# EAGLE board ProiectTSC v64 (EAGLE 9.7.0)
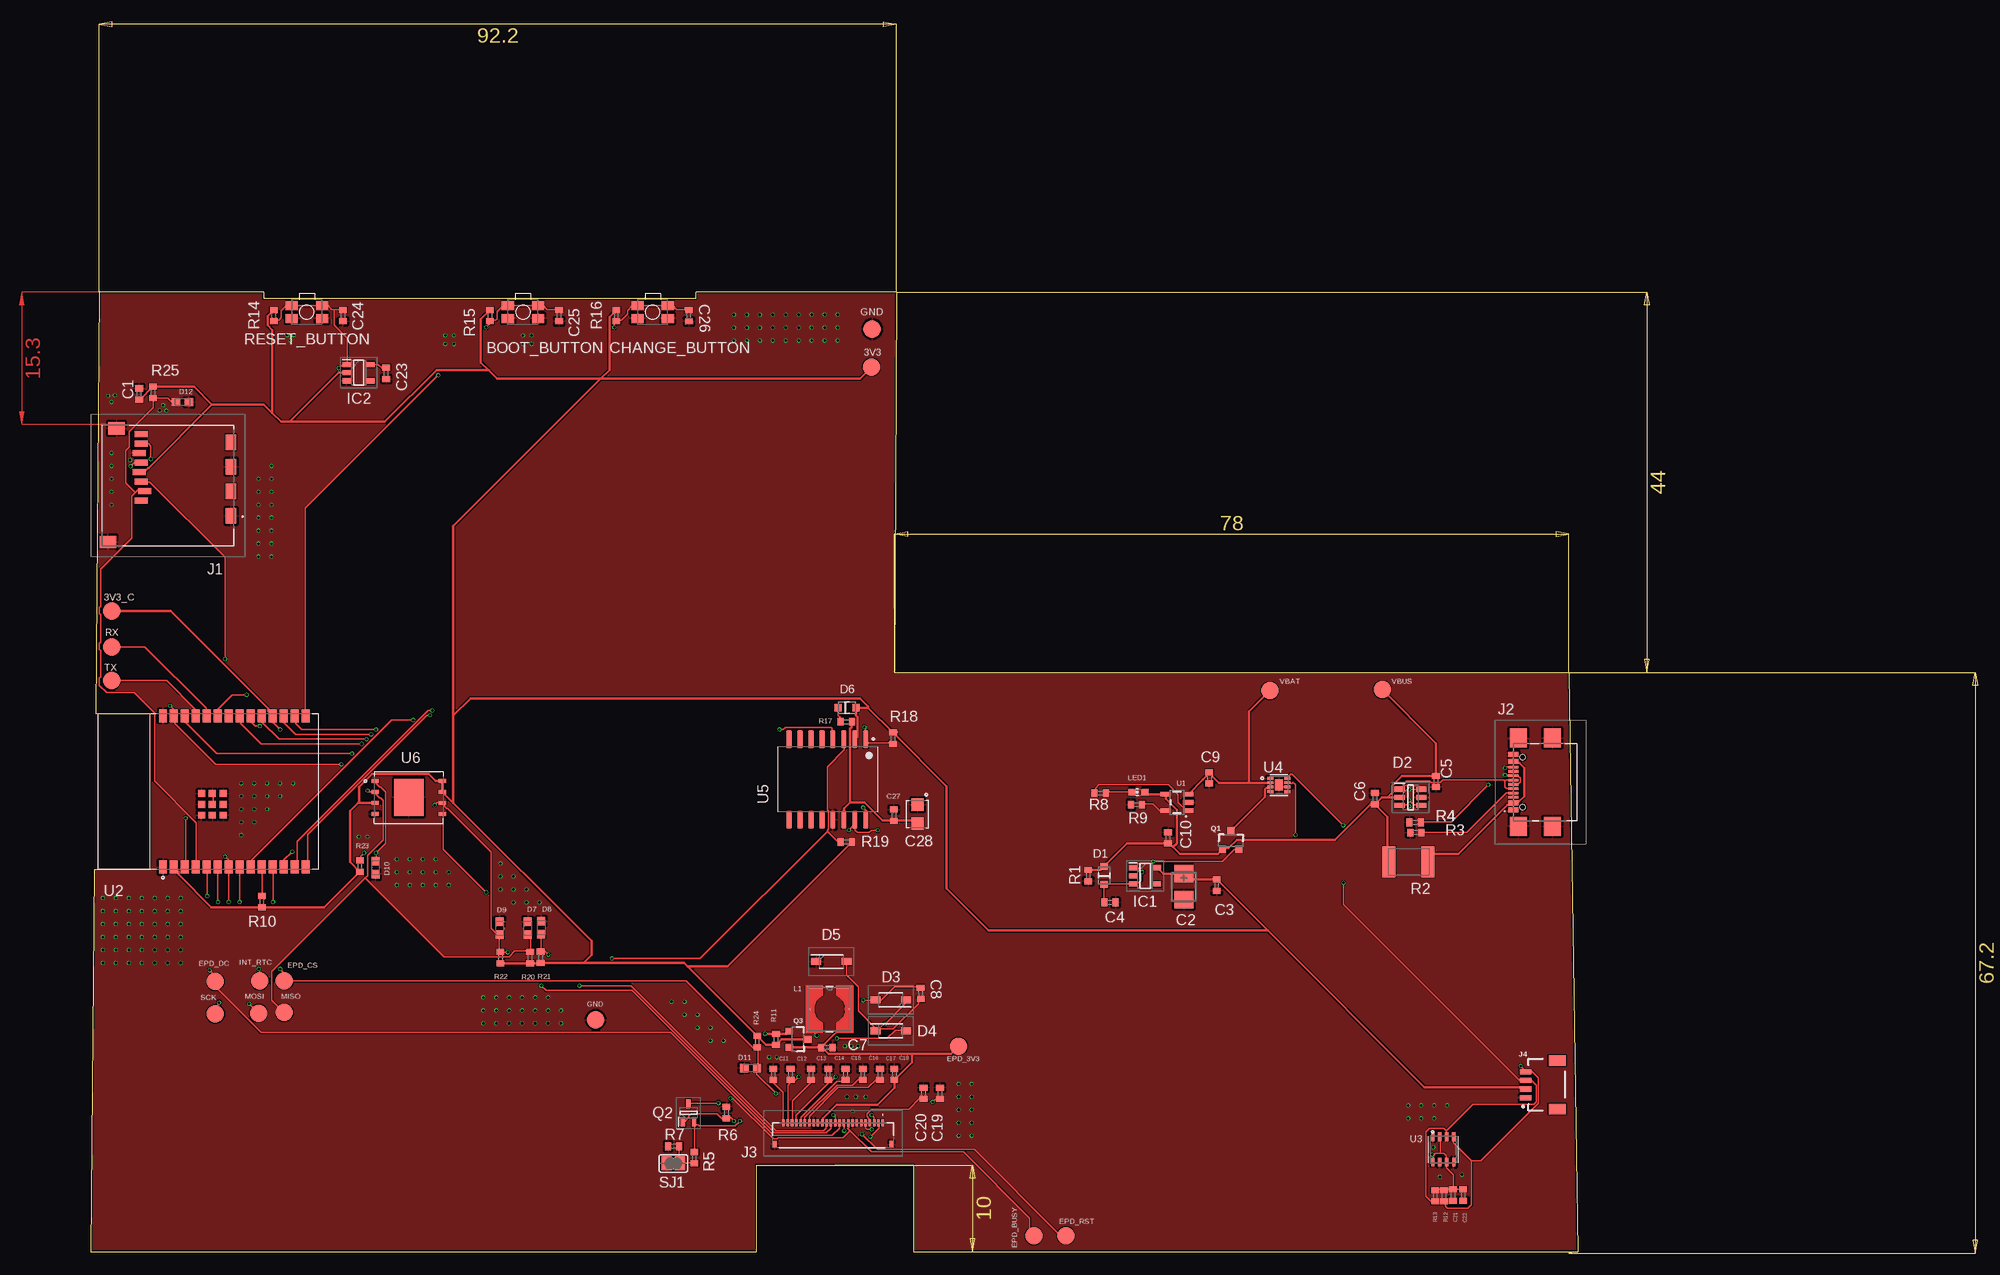
[diagram p0: board, top side]
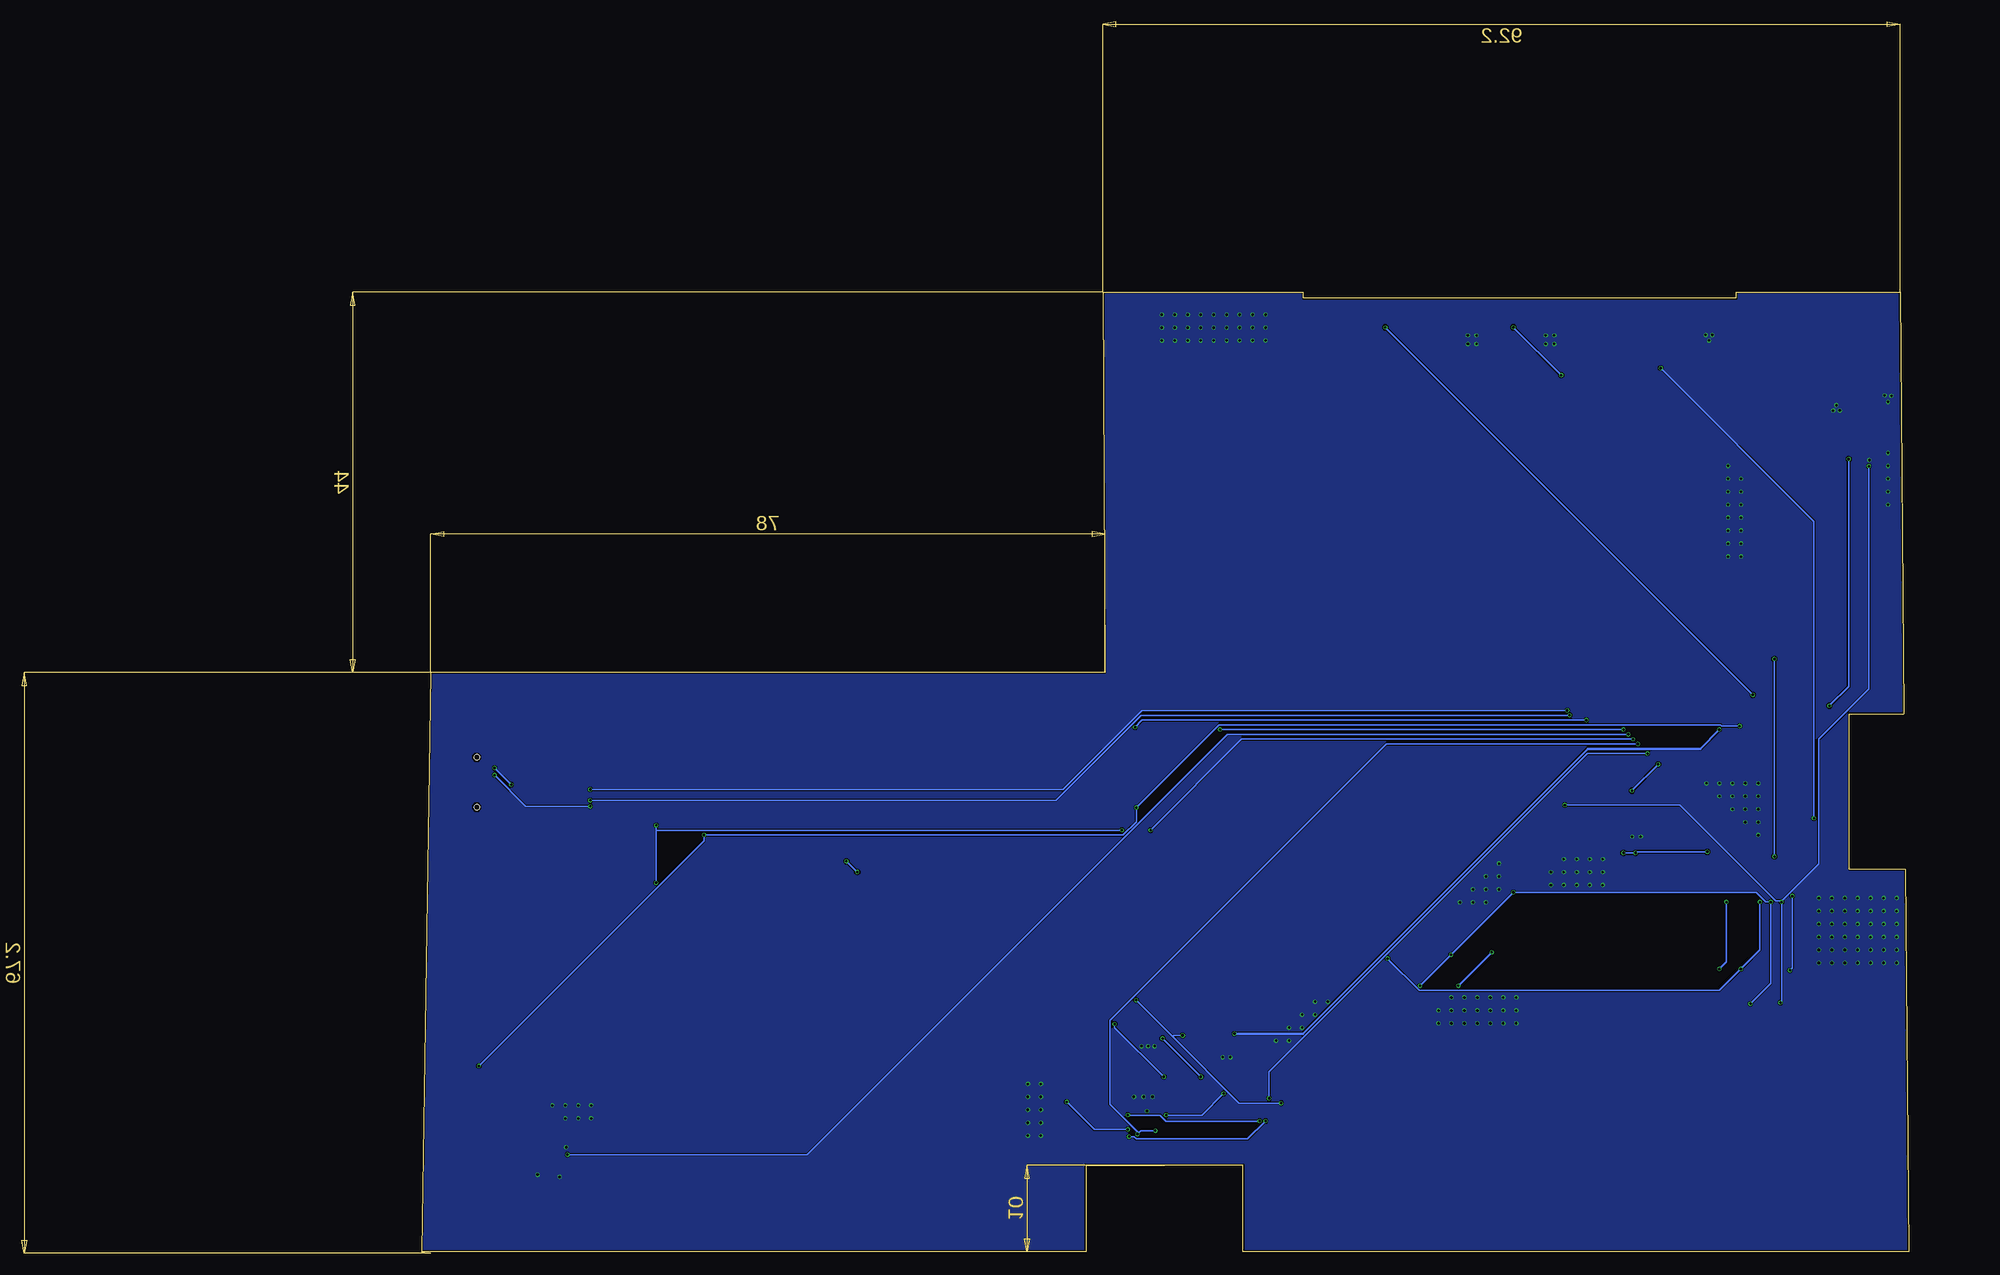
[diagram p1: board, bottom side, seen from below]

Size 172 x 111.2 mm. Coordinates in mm from the lower left corner, seen from the top.
Outline: 172,0.2 171,67.2 93,67.2 93.2,111.2 70,111.2 70,110.5 20,110.5 20,111.2 1,111.2 0.56,62.42 6.86,62.42 6.86,44.42 0.4,44.42 0,0.2 77,0.2 77,10.2 95.2,10.2 95.2,0.2 172,0.2
Outline: 172,0.2 171,0
Copper layers (1*16): Top / Bottom
Stack-up Default Layer Stack: Top User Defined 0.035mm / Dielectric-1 User Defined 1mm / Bottom User Defined 0.035mm
Design rules: minimum copper width 0.12mm, minimum drill size 0.3mm, copper clearance wire_polygon to wire_polygon 5mil, copper clearance wire_polygon to pad_smd 5mil, copper clearance wire_polygon to via 5mil, copper clearance pad_smd to pad_smd 5mil, copper clearance pad_smd to via 5mil, copper clearance via to via 5mil, copper clearance smd to pad (same net) 5mil, copper clearance smd to via (same net) 5mil, copper clearance smd to smd (same net) 5mil, dimension clearance 0.2mm, via restrict clearance 0mil, restrict clearance 0mil, drill distance 6mil, keepout clearance 0mil

## Footprints (pad centres in the part's own frame; a part is rotated, then mirrored left to right if it is on the bottom)
MYBUTTON = smd 1.4 x 1.05: 1 1.75,0.75; 2 -1.75,0.75; 3 -1.75,-0.75; 4 1.75,-0.75
EAGLE-LTSPICE_C0402 = smd 0.7 x 0.9: 1 -0.65,0; 2 0.65,0
RCL_CT3528 = smd 2 x 2.2: + -1.5,0; - 1.5,0
ESP32_WROVER_EAGLE-LTSPICE_C0402 = smd 0.7 x 0.9: 1 -0.65,0; 2 0.65,0
CAPCP3225X100N = smd 1.4 x 1.4: 1 -1.1,0; 2 1.1,0
ESP32_WROVER_AVX---SD0805S020S1R0_AVX_SD0805S020S1R0_0 = smd 0.8 x 0.9: 1 -1.05,0; 2 1.05,0
SOT95P280X145-6N = smd 1.2 x 0.6: 1 -1.25,0.95; 2 -1.25,0; 3 -1.25,-0.95; 4 1.25,-0.95; 5 1.25,0; 6 1.25,0.95
SOD3716X135N = smd 1.15 x 0.8: 1 -1.75,0; 2 1.75,0
DIOC1608X36N = smd 0.97 x 0.94: 1 -0.75,0; 2 0.75,0
SOT95P280X120-5N = smd 0.9 x 0.6: 1 -1.4,0.95; 2 -1.4,0; 3 -1.4,-0.95; 4 1.4,-0.95; 5 1.4,0.95
SOT95P280X125-5N = smd 0.9 x 0.6: 1 -1.4,0.95; 2 -1.4,0; 3 -1.4,-0.95; 4 1.4,-0.95; 5 1.4,0.95
112ATAARR03ATTEND = smd 1.8 x 1.2: G1 10.6,10.4; G2 4.9,10.4; S1 7.75,10.4; S2 2.05,10.4 | smd 1.4 x 1.9: G3 13.6,-3.85; G4 0.45,-2.85 | smd 0.7 x 1.5: P1 8.8,0; P2 7.7,0.4; P3 6.6,0; P4 5.5,-0.2; P5 4.4,0; P6 3.3,-0.2; P7 2.2,0; P8 1.1,0
SAMACSYS_PARTS_USB4110GFA = smd 0.3 x 1.15: A1 -3.35,3.678; A4 -2.55,3.678; A5 -1.25,3.678; A6 -0.25,3.678; A7 0.25,3.678; A8 1.25,3.678; A9 2.55,3.678; A12 3.35,3.678; B1 3.05,3.678; B4 2.25,3.678; B5 1.75,3.678; B6 0.75,3.678; B7 -0.75,3.678; B8 -1.75,3.678; B9 -2.25,3.678; B12 -3.05,3.678 | smd 2.18 x 2: MP1 -5.11,-0.827; MP2 5.11,-0.827; MP3 -5.11,3.103; MP4 5.11,3.103 | hole 0.65: -2.89,2.603; 2.89,2.603
FH34SRJ24S05SH99 = smd 0.3 x 0.8: 1 5.75,1.45; 2 5.25,1.45; 3 4.75,1.45; 4 4.25,1.45; 5 3.75,1.45; 6 3.25,1.45; 7 2.75,1.45; 8 2.25,1.45; 9 1.75,1.45; 10 1.25,1.45; 11 0.75,1.45; 12 0.25,1.45; 13 -0.25,1.45; 14 -0.75,1.45; 15 -1.25,1.45; 16 -1.75,1.45; 17 -2.25,1.45; 18 -2.75,1.45; 19 -3.25,1.45; 20 -3.75,1.45; 21 -4.25,1.45; 22 -4.75,1.45; 23 -5.25,1.45; 24 -5.75,1.45 | smd 0.4 x 0.8: MP1 6.75,-1.05; MP2 -6.75,-1.05
JST04_1MM_RA = smd 0.6 x 1.35: 1 -1.5,0; 2 -0.5,0; 3 0.5,0; 4 1.5,0 | smd 1.2 x 2: NC1 2.8,-3.675; NC2 -2.8,-3.675
IND_4828-WE-TPC_WRE = smd 0.127 x 0.127: 1 -2.286,0; 2 2.286,0
ADAFRUIT_CHIP-LED0603 = smd 0.8 x 0.8: A 0,-0.75; C 0,0.75
ESP32_WROVER_SPARKFUN-DISCRETESEMI_SOT23-3 = smd 0.8 x 0.9: 1 -0.95,-1; 2 0.95,-1; 3 0,1.1
SOT65P210X110-3N = smd 1.05 x 0.5: 1 -1.05,0.65; 2 -1.05,-0.65; 3 1.05,0
ESP32_WROVER_EAGLE-LTSPICE_R0402 = smd 0.7 x 0.9: 1 -0.65,0; 2 0.65,0
ESP32C6_VARISTOR_CT/CN1812 = smd 1.5 x 3.6: 1 -2.25,0; 2 2.25,0
SJ = smd 1.168 x 1.6: 1 -0.762,0; 2 0.762,0
TP20R = smd 2 x 2: TP 0,0
ESP32_WROVER_SPARKFUN-IC-POWER_SOT23-5 = smd 0.55 x 1.2: 1 -0.95,-1.3; 2 0,-1.3; 3 0.95,-1.3; 4 0.95,1.3; 5 -0.95,1.3
XCVR_ESP32-C6-WROOM-1-N8 = smd 1.5 x 0.9: 1 -8.75,5.26; 2 -8.75,3.99; 3 -8.75,2.72; 4 -8.75,1.45; 5 -8.75,0.18; 6 -8.75,-1.09; 7 -8.75,-2.36; 8 -8.75,-3.63; 9 -8.75,-4.9; 10 -8.75,-6.17; 11 -8.75,-7.44; 12 -8.75,-8.71; 13 -8.75,-9.98; 14 -8.75,-11.25; 15 8.75,-11.25; 16 8.75,-9.98; 17 8.75,-8.71; 18 8.75,-7.44; 19 8.75,-6.17; 20 8.75,-4.9; 21 8.75,-3.63; 22 8.75,-2.36; 23 8.75,-1.09; 24 8.75,0.18; 25 8.75,1.45; 26 8.75,2.72; 27 8.75,3.99; 28 8.75,5.26 | smd 0.8 x 0.8: 29_1 -2.755,0.79; 29_2 -1.505,0.79; 29_3 -0.255,0.79; 29_4 -2.755,-0.46; 29_5 -1.505,-0.46; 29_6 -0.255,-0.46; 29_7 -2.755,-1.71; 29_8 -1.505,-1.71; 29_9 -0.255,-1.71
ESP32_WROVER_BME680_PSON80P300X300X100-8N = smd 1.016 x 0.5: 1 1.458,1.2; 2 1.458,0.4; 3 1.458,-0.4; 4 1.458,-1.2; 5 -1.458,-1.22; 6 -1.458,-0.4; 7 -1.458,0.4; 8 -1.458,1.2
SON50P200X200X80-9N = smd 0.76 x 0.27: 1 -0.985,0.75; 2 -0.985,0.25; 3 -0.985,-0.25; 4 -0.985,-0.75; 5 0.985,-0.75; 6 0.985,-0.25; 7 0.985,0.25; 8 0.985,0.75 | smd 0.9 x 1.3: 9 0,0
SOIC127P1032X265-16N = smd 2.05 x 0.59: 1 -4.655,4.445; 2 -4.655,3.175; 3 -4.655,1.905; 4 -4.655,0.635; 5 -4.655,-0.635; 6 -4.655,-1.905; 7 -4.655,-3.175; 8 -4.655,-4.445; 9 4.655,-4.445; 10 4.655,-3.175; 11 4.655,-1.905; 12 4.655,-0.635; 13 4.655,0.635; 14 4.655,1.905; 15 4.655,3.175; 16 4.655,4.445
SON127P600X800X80-9N = smd 0.94 x 0.44: 1 -3.895,1.905; 2 -3.895,0.635; 3 -3.895,-0.635; 4 -3.895,-1.905; 5 3.895,-1.905; 6 3.895,-0.635; 7 3.895,0.635; 8 3.895,1.905 | smd 3.4 x 4.3: 9 0,0

## Placement (x,y rotation side)
BOOT_BUTTON  BUTTON_CUSYOMV1  [MYBUTTON]  50,108.91 180 top
C1  100nF  [EAGLE-LTSPICE_C0402]  5.61,99.42 90 top
C2  100uF  [RCL_CT3528]  126.45,42.42 270 top
C3  4.7uF  [ESP32_WROVER_EAGLE-LTSPICE_C0402]  130.25,42.59 270 top
C4  4.7uF  [ESP32_WROVER_EAGLE-LTSPICE_C0402]  117.9,40.59 0 top
C5  100nF  [EAGLE-LTSPICE_C0402]  155.6,54.59 270 top
C6  4.7uF  [EAGLE-LTSPICE_C0402]  148.55,52.59 90 top
C7  10uF  [EAGLE-LTSPICE_C0402]  85.15,23.81 0 top
C8  4.7uF/25V  [EAGLE-LTSPICE_C0402]  96.01,30.07 91 top
C9  4.7uF  [EAGLE-LTSPICE_C0402]  129.39,55 270 top
C10  4.7uF  [EAGLE-LTSPICE_C0402]  124.61,48.05 90 top
C11  1uF/50V  [EAGLE-LTSPICE_C0402]  78.96,20.7 270 top
C12  1uF/50V  [EAGLE-LTSPICE_C0402]  80.96,20.7 270 top
C13  1uF/50V  [EAGLE-LTSPICE_C0402]  83.31,20.7 270 top
C14  1uF/50V  [EAGLE-LTSPICE_C0402]  85.31,20.7 270 top
C15  1uF/50V  [EAGLE-LTSPICE_C0402]  87.31,20.7 270 top
C16  1uF/50V  [EAGLE-LTSPICE_C0402]  89.31,20.7 270 top
C17  1uF/50V  [EAGLE-LTSPICE_C0402]  91.31,20.7 270 top
C18  0.1uF/50V  [EAGLE-LTSPICE_C0402]  92.96,20.7 270 top
C19  1uF/50V  [EAGLE-LTSPICE_C0402]  98.23,18.51 90 top
C20  1uF/50V  [EAGLE-LTSPICE_C0402]  96.34,18.51 90 top
C21  100nF  [EAGLE-LTSPICE_C0402]  157.57,6.75 270 top
C22  100nF  [EAGLE-LTSPICE_C0402]  158.76,6.75 270 top
C23  100nF  [EAGLE-LTSPICE_C0402]  34.18,101.8 270 top
C24  1uF  [EAGLE-LTSPICE_C0402]  29.18,108.48 270 top
C25  100nF  [EAGLE-LTSPICE_C0402]  54.18,108.48 270 top
C26  100nF  [EAGLE-LTSPICE_C0402]  69.18,108.47 271.4 top
C27  100nF  [EAGLE-LTSPICE_C0402]  92.9,50.68 90 top
C28  CPH3225A  [CAPCP3225X100N]  95.64,50.8 270 top
CHANGE_BUTTON  BUTTON_CUSYOMV1  [MYBUTTON]  65,108.91 180 top
D1  ESP32_WROVER_AVX---SD0805S020S1R0_AVX_SD0805S020S1R0_0_0AVX_SD0805S020S1R0_0_0  [ESP32_WROVER_AVX---SD0805S020S1R0_AVX_SD0805S020S1R0_0]  117.23,43.73 90 top
D2  USBLC6-2SC6Y  [SOT95P280X145-6N]  152.68,52.75 0 top
D3  4.7uF/25V  [SOD3716X135N]  92.56,29.3 180 top
D4  MBR0530  [SOD3716X135N]  92.54,25.75 0 top
D5  MBR0530  [SOD3716X135N]  85.66,33.75 0 top
D6  ESP32_WROVER_AVX---SD0805S020S1R0_AVX_SD0805S020S1R0_0_0AVX_SD0805S020S1R0_0_0  [ESP32_WROVER_AVX---SD0805S020S1R0_AVX_SD0805S020S1R0_0]  87.48,63.11 0 top
D7  PGB1010603MR  [DIOC1608X36N]  50.55,37.63 270 top
D8  PGB1010603MR  [DIOC1608X36N]  52.12,37.67 270 top
D9  PGB1010603MR  [DIOC1608X36N]  47.31,37.63 270 top
D10  PGB1010603MR  [DIOC1608X36N]  32.95,44.6 90 top
D11  PGB1010603MR  [DIOC1608X36N]  76.33,21.43 0 top
D12  PGB1010603MR  [DIOC1608X36N]  10.6,98.47 180 top
IC1  XC6220A331MR-G  [SOT95P280X120-5N]  121.96,43.67 0 top
IC2  BD5229G-TR  [SOT95P280X125-5N]  30.99,101.88 0 top
J1  112A-TAAR-R03_ATTEND  [112ATAARR03ATTEND]  5.83,95.9 270 top
J2  SAMACSYS_PARTS_USB4110-GF-A  [SAMACSYS_PARTS_USB4110GFA]  168.25,54.5 90 top
J3  FH34SRJ-24S-0.5SH_99_  [FH34SRJ24S05SH99]  85.87,13.67 0 top
J4  QWIIC_RIGHT_ANGLE  [JST04_1MM_RA]  165.97,19.5 90 top
L1  68uH  [IND_4828-WE-TPC_WRE]  85.47,28.25 0 top
LED1  [ADAFRUIT_CHIP-LED0603]  121.2,53.35 90 top
Q1  20V/4.2A/52mΩ/1.4W  [ESP32_WROVER_SPARKFUN-DISCRETESEMI_SOT23-3]  131.88,47.76 0 top
Q2  SI1308EDL-T1-GE3  [SOT65P210X110-3N]  69.14,16.24 90 top
Q3  20V/4.2A/52mΩ/1.4W  [ESP32_WROVER_SPARKFUN-DISCRETESEMI_SOT23-3]  81.8,24.76 270 top
R1  100K  [ESP32_WROVER_EAGLE-LTSPICE_R0402]  115.39,43.7 270 top
R2  ESP32C6_VARISTORCN1812  [ESP32C6_VARISTOR_CT/CN1812]  152.44,45.29 180 top
R3  5k1  [ESP32_WROVER_EAGLE-LTSPICE_R0402]  153.28,48.68 0 top
R4  5k1  [ESP32_WROVER_EAGLE-LTSPICE_R0402]  153.21,49.85 180 top
R5  0.47  [ESP32_WROVER_EAGLE-LTSPICE_R0402]  69.83,11.06 90 top
R6  10k  [ESP32_WROVER_EAGLE-LTSPICE_R0402]  73.53,16.29 90 top
R7  2.2  [ESP32_WROVER_EAGLE-LTSPICE_R0402]  67.43,12.37 0 top
R8  200  [ESP32_WROVER_EAGLE-LTSPICE_R0402]  116.78,53.24 180 top
R9  2k  [ESP32_WROVER_EAGLE-LTSPICE_R0402]  120.98,51.91 0 top
R10  10k  [ESP32_WROVER_EAGLE-LTSPICE_R0402]  19.79,40.69 270 top
R11  10k  [ESP32_WROVER_EAGLE-LTSPICE_R0402]  79.27,24.76 270 top
R12  10k  [ESP32_WROVER_EAGLE-LTSPICE_R0402]  156.54,6.65 90 top
R13  10k  [ESP32_WROVER_EAGLE-LTSPICE_R0402]  155.51,6.65 90 top
R14  10k  [ESP32_WROVER_EAGLE-LTSPICE_R0402]  21.18,108.48 90 top
R15  10k  [ESP32_WROVER_EAGLE-LTSPICE_R0402]  46.18,108.48 90 top
R16  10k  [ESP32_WROVER_EAGLE-LTSPICE_R0402]  60.8,108.48 90 top
R17  15  [ESP32_WROVER_EAGLE-LTSPICE_R0402]  87.4,61.49 0 top
R18  10K  [ESP32_WROVER_EAGLE-LTSPICE_R0402]  92.79,59.6 90 top
R19  10k  [ESP32_WROVER_EAGLE-LTSPICE_R0402]  87.4,47.6 0 top
R20  10k  [ESP32_WROVER_EAGLE-LTSPICE_R0402]  50.81,34.21 270 top
R21  10k  [ESP32_WROVER_EAGLE-LTSPICE_R0402]  52.05,34.25 270 top
R22  10k  [ESP32_WROVER_EAGLE-LTSPICE_R0402]  47.39,34.2 270 top
R23  10k  [ESP32_WROVER_EAGLE-LTSPICE_R0402]  31.13,44.8 270 top
R24  10k  [ESP32_WROVER_EAGLE-LTSPICE_R0402]  77.1,24.49 90 top
R25  10k  [ESP32_WROVER_EAGLE-LTSPICE_R0402]  7.19,99.6 90 top
RESET_BUTTON  BUTTON_CUSYOMV1  [MYBUTTON]  25,108.91 180 top
SJ1  [SJ]  67.39,10.4 0 top
TP1  TPTP20R  [TP20R]  2.4,66.25 0 top
TP2  TPTP20R  [TP20R]  2.4,70.17 0 top
TP3  TPTP20R  [TP20R]  136.4,65.09 0 top
TP4  TPTP20R  [TP20R]  58.4,27.01 0 top
TP5  TPTP20R  [TP20R]  90.4,106.93 0 top
TP6  TPTP20R  [TP20R]  22.4,27.85 0 top
TP7  TPTP20R  [TP20R]  19.4,27.77 0 top
TP8  TPTP20R  [TP20R]  14.4,27.69 0 top
TP9  TPTP20R  [TP20R]  109.1,2.01 0 top
TP10  TPTP20R  [TP20R]  22.4,31.53 0 top
TP11  TPTP20R  [TP20R]  14.4,31.45 0 top
TP12  TPTP20R  [TP20R]  112.8,2.05 0 top
TP13  TPTP20R  [TP20R]  2.4,74.29 0 top
TP14  TPTP20R  [TP20R]  149.4,65.21 0 top
TP15  TPTP20R  [TP20R]  19.56,31.5 0 top
TP16  TPTP20R  [TP20R]  90.32,102.53 0 top
TP17  TPTP20R  [TP20R]  100.4,23.97 0 top
U1  ESP32_WROVER_SPARKFUN-IC-POWER_MCP73831  [ESP32_WROVER_SPARKFUN-IC-POWER_SOT23-5]  125.66,52.16 90 top
U2  ESP32-C6-WROOM-1-N8  [XCVR_ESP32-C6-WROOM-1-N8]  13.6,53.44 90 top
U3  ESP32_WROVER_BME680_BME680  [ESP32_WROVER_BME680_PSON80P300X300X100-8N]  156.45,12.01 90 top
U4  MAX17048G+T10  [SON50P200X200X80-9N]  137.45,54.19 0 top
U5  DS3231SN#  [SOIC127P1032X265-16N]  85.21,54.81 270 top
U6  W25Q512JVEIQ  [SON127P600X800X80-9N]  36.78,52.74 0 top

## Library data of the parts
BOOT_BUTTON C3 C4 CHANGE_BUTTON LED1 R2 RESET_BUTTON SJ1 TP1-TP17 = DeskAssistant v19 v1
C1 C5-C27 = DeskAssistant v19 v1; SPICEMODEL: NONE; SPICEPREFIX: C
C2 = DeskAssistant v19 v1; SPICEPREFIX: C
C28 = DeskAssistant v19 v1; AVAILABILITY: Not in stock; CHECK_PRICES: https://www.snapeda.com/parts/CPH3225A/Seiko+Instruments/view-part/?ref=eda; DESCRIPTION: 11 mF (EDLC) Supercapacitor 3.3 V 1210 (3225 Metric) - -; MF: Seiko Instruments; MP: CPH3225A; PACKAGE: 1210 Seiko; PRICE: None; PURCHASE-URL: https://www.snapeda.com/api/url_track_click_mouser/?unipart_id=562593&manufacturer=Seiko Instruments&part_name=CPH3225A&search_term=None; SNAPEDA_LINK: https://www.snapeda.com/parts/CPH3225A/Seiko+Instruments/view-part/?ref=snap
D1 D6 = DeskAssistant v19 v1; CENTROID_NOT_SPECIFIED: No; DATASHEET: http://datasheets.avx.com/schottky.pdf; DIGIKEY_DESCRIPTION: DIODE SCHOTTKY 20V 1A 0805; DIGIKEY_PART_NUMBER: 478-7800-1-ND; LEAD_FREE: yes; MF: AVX; MOUSER_PART_NUMBER: 581-SD0805S020S1R0; PACKAGE: 0805 (2012 metric); PREFIX: D; ROHS: yes; TEMPERATURE_RANGE_HIGH: +125°C; TEMPERATURE_RANGE_LOW: -55°C
D2 = DeskAssistant v19 v1; AVAILABILITY: In Stock; CHECK_PRICES: https://www.snapeda.com/parts/USBLC6-2SC6Y/STMicroelectronics/view-part/?ref=eda; DESCRIPTION: 17V Clamp 5A (8/20µs) Ipp Tvs Diode Surface Mount SOT-23-6; MF: STMicroelectronics; MP: USBLC6-2SC6Y; PACKAGE: SOT-23-6 STMicroelectronics; PRICE: None; SNAPEDA_LINK: https://www.snapeda.com/parts/USBLC6-2SC6Y/STMicroelectronics/view-part/?ref=snap
D3-D5 = DeskAssistant v19 v1; AVAILABILITY: In Stock; CHECK_PRICES: https://www.snapeda.com/parts/MBR0530/Onsemi/view-part/?ref=eda; DESCRIPTION: Diode Schottky 30 V 500mA Surface Mount SOD-123; MF: ON Semiconductor; MP: MBR0530; PACKAGE: SOD-123-2 ON Semiconductor; PRICE: None; PURCHASE-URL: https://www.snapeda.com/api/url_track_click_mouser/?unipart_id=179458&manufacturer=ON Semiconductor&part_name=MBR0530&search_term=None; SNAPEDA_LINK: https://www.snapeda.com/parts/MBR0530/Onsemi/view-part/?ref=snap
D7-D12 = DeskAssistant v19 v1; AVAILABILITY: In Stock; CHECK_PRICES: https://www.snapeda.com/parts/PGB1010603MR/Littelfuse/view-part/?ref=eda; DESCRIPTION: 150V (Typ) Clamp - Ipp Tvs Diode Surface Mount 0603 (1608 Metric); MF: Littelfuse Inc.; MP: PGB1010603MR; PACKAGE: 0603 Littelfuse Inc.; PRICE: None; PURCHASE-URL: https://www.snapeda.com/api/url_track_click_mouser/?unipart_id=5659453&manufacturer=Littelfuse Inc.&part_name=PGB1010603MR&search_term=None; SNAPEDA_LINK: https://www.snapeda.com/parts/PGB1010603MR/Littelfuse/view-part/?ref=snap
IC1 = DeskAssistant v19 v1; DESCRIPTION: LDO Voltage Regulators; HEIGHT: 1.2mm; MANUFACTURER_NAME: Torex; MANUFACTURER_PART_NUMBER: XC6220A331MR-G; MOUSER_PART_NUMBER: 865-XC6220A331MR-G; MOUSER_PRICE-STOCK: https://www.mouser.co.uk/ProductDetail/Torex-Semiconductor/XC6220A331MR-G?qs=AsjdqWjXhJ8ZSWznL1J0gg%3D%3D
IC2 = DeskAssistant v19 v1; DESCRIPTION: Voltage Detector with Adjustable Delay Time: CMOS processes are utilized to develop high precision, low current consumption CMOS reset ICs that allow arbitrary setting of the delay time. The extensive lineup includes both Nch Open Drain and CMOS output types in a wide range of detection voltages (from 2.3V to 6.0V, in 0.1V steps), enabling selection of the ideal solution based on customer requirements. In addition, the entire series is of course both lead-free and RoHS-compliant.; HEIGHT: 1.25mm; MANUFACTURER_NAME: ROHM Semiconductor; MANUFACTURER_PART_NUMBER: BD5229G-TR; MOUSER_PART_NUMBER: 755-BD5229G-TR; MOUSER_PRICE-STOCK: https://www.mouser.co.uk/ProductDetail/ROHM-Semiconductor/BD5229G-TR?qs=4kLU8WoGk0vvnhrrYwdszw%3D%3D
J1 = DeskAssistant v19 v1; DESCRIPTION: Micro SD Card Socket, Push-Push Type, Top Mount, SMT, H=1.83mm, 10u; HEIGHT: 1.9mm; MANUFACTURER_NAME: ATTEND; MANUFACTURER_PART_NUMBER: 112A-TAAR-R03 ATTEND
J2 = DeskAssistant v19 v1; DESCRIPTION: CONN USB 2.0 TYPE-C R/A SMT; HEIGHT: 3.26mm; MANUFACTURER_NAME: GCT (GLOBAL CONNECTOR TECHNOLOGY); MANUFACTURER_PART_NUMBER: USB4110-GF-A; MOUSER_PART_NUMBER: 640-USB4110-GF-A; MOUSER_PRICE-STOCK: https://www.mouser.co.uk/ProductDetail/GCT/USB4110-GF-A?qs=KUoIvG%2F9IlYiZvIXQjyJeA%3D%3D
J3 = DeskAssistant v19 v1; DESCRIPTION: 24 Position FFC, FPC Connector Contacts, Top and Bottom 0.020" (0.50mm) Surface Mount, Right Angle; HEIGHT: 1.1mm; MANUFACTURER_NAME: Hirose; MANUFACTURER_PART_NUMBER: FH34SRJ-24S-0.5SH(99); MOUSER_PART_NUMBER: 798-FH34SRJ24S05SH99; MOUSER_PRICE-STOCK: https://www.mouser.co.uk/ProductDetail/Hirose-Connector/FH34SRJ-24S-0.5SH99?qs=vcbW%252B4%252BSTIpKBl5ap9J8Fw%3D%3D
J4 = DeskAssistant v19 v1; PROD_ID: CONN-13694
L1 = DeskAssistant v19 v1; COPYRIGHT: Copyright (C) 2024 Ultra Librarian. All rights reserved.; MANUFACTURER_PART_NUMBER: 744043680; MFR_NAME: Wurth Electronics
Q1 Q3 = DeskAssistant v19 v1; PROD_ID: TRAN-14388
Q2 = DeskAssistant v19 v1; AVAILABILITY: In Stock; CHECK_PRICES: https://www.snapeda.com/parts/SI1308EDL-T1-GE3/Vishay+Siliconix/view-part/?ref=eda; DESCRIPTION: Si1308EDL-T1-GE3 N-channel MOSFET Transistor, 1.5 A, 30 V, 3-Pin SC-70 | Siliconix / Vishay SI1308EDL-T1-GE3; MF: Vishay Siliconix; MP: SI1308EDL-T1-GE3; PACKAGE: SOT-323 Vishay Semiconductor; PRICE: None; PURCHASE-URL: https://www.snapeda.com/api/url_track_click_mouser/?unipart_id=274603&manufacturer=Vishay Siliconix&part_name=SI1308EDL-T1-GE3&search_term=None; SNAPEDA_LINK: https://www.snapeda.com/parts/SI1308EDL-T1-GE3/Vishay+Siliconix/view-part/?ref=snap
R1 R3-R25 = DeskAssistant v19 v1; SPICEMODEL: NONE; SPICEPREFIX: R
U1 = DeskAssistant v19 v1; PROD_ID: IC-09995
U2 = DeskAssistant v19 v1; AVAILABILITY: In Stock; CHECK_PRICES: https://www.snapeda.com/parts/ESP32-C6-WROOM-1-N8/Espressif+Systems/view-part/?ref=eda; DESCRIPTION: Multiprotocol Modules ESP32-C6 module, Wi-Fi 6 in 2.4 GHz band, Bluetooth 5, Zigbee 3.0 and Thread. ESP34-WROOM Compatible - ENGINEERING SAMPLE; MF: Espressif Systems; MP: ESP32-C6-WROOM-1-N8; PACKAGE: None; PRICE: None; SNAPEDA_LINK: https://www.snapeda.com/parts/ESP32-C6-WROOM-1-N8/Espressif+Systems/view-part/?ref=snap
U3 = DeskAssistant v19 v1; AVAILABILITY: Unavailable; DESCRIPTION: Integrated Environmental Unit; MF: Bosch Sensortec; MP: BME680; PACKAGE: LGA-8 Bosch Tools; PRICE: None
U4 = DeskAssistant v19 v1; AVAILABILITY: In Stock; CHECK_PRICES: https://www.snapeda.com/parts/MAX17048G+T10/Analog+Devices/view-part/?ref=eda; DESCRIPTION: 3µA 1-Cell/2-Cell Fuel Gauge with ModelGauge; MF: Analog Devices; MP: MAX17048G+T10; PACKAGE: TDFN-8 Maxim; PRICE: None; PURCHASE-URL: https://www.snapeda.com/api/url_track_click_mouser/?unipart_id=329239&manufacturer=Analog Devices&part_name=MAX17048G+T10&search_term=None; SNAPEDA_LINK: https://www.snapeda.com/parts/MAX17048G+T10/Analog+Devices/view-part/?ref=snap
U5 = DeskAssistant v19 v1; AVAILABILITY: In Stock; CHECK_PRICES: https://www.snapeda.com/parts/DS3231SN%23/Analog+Devices/view-part/?ref=eda; DESCRIPTION: Extremely Accurate I²C-Integrated RTC/TCXO/Crystal; MF: Analog Devices; MP: DS3231SN#; PACKAGE: SOIC-16 Maxim; PRICE: None; PURCHASE-URL: https://www.snapeda.com/api/url_track_click_mouser/?unipart_id=99048&manufacturer=Analog Devices&part_name=DS3231SN#&search_term=None; SNAPEDA_LINK: https://www.snapeda.com/parts/DS3231SN%23/Analog+Devices/view-part/?ref=snap
U6 = DeskAssistant v19 v1; AVAILABILITY: In Stock; CHECK_PRICES: https://www.snapeda.com/parts/W25Q512JVEIQ/Winbond+Electronics/view-part/?ref=eda; DESCRIPTION: FLASH - NOR Memory IC 512Mb (64M x 8) SPI - Quad I/O 133 MHz 8-WSON (8x6); MF: Winbond Electronics; MP: W25Q512JVEIQ; PACKAGE: Package; PRICE: None; SNAPEDA_LINK: https://www.snapeda.com/parts/W25Q512JVEIQ/Winbond+Electronics/view-part/?ref=snap

## Nets
3V3: C1.1 C2.+ C3.1 D6.2 IC1.5 IC2.2 J1.P4 J4.2 Q3.3 R10.2 R11.2 R14.2 R15.2 R16.2 R18.2 R19.2 R20.2 R21.2 R22.2 R23.2 R24.2 R25.2 TP16.TP U2.2 U5.2 U6.3 U6.7 U6.8
32KHZ: R18.1 U2.9 U5.1
DN: D2.1 J2.A7 J2.B7
DP: D2.3 J2.A6 J2.B6
EPD_3V3: C7.1 C18.2 J3.15 J3.16 L1.2 Q3.2 TP17.TP
EPD_3V3_C: Q3.1 R11.1 TP13.TP U2.18
EPD_BUSY: J3.9 TP9.TP U2.26
EPD_CS: D11.2 J3.12 R24.1 TP10.TP U2.11
EPD_DC: J3.11 TP11.TP U2.5
EPD_RST: J3.10 TP12.TP U2.21
FLASH_CS: D10.2 R23.1 U2.12 U6.1
GDR: J3.2 Q2.1 R6.1
GND: BOOT_BUTTON.1 BOOT_BUTTON.2 C1.2 C2.- C3.2 C4.2 C5.2 C6.2 C7.2 C9.2 C10.2 C11.1 C12.1 C13.1 C14.1 C15.1 C16.1 C17.1 C18.1 C19.2 C20.2 C21.2 C22.2 C23.2 C24.2 C25.2 C26.2 C27.2 C28.1 CHANGE_BUTTON.1 CHANGE_BUTTON.2 D2.5 D5.1 D7.1 D8.1 D9.1 D10.1 D11.1 D12.1 IC1.2 IC2.3 J1.G1 J1.G2 J1.G3 J1.G4 J1.P6 J2.A1 J2.A12 J2.B1 J2.B12 J2.MP1 J2.MP2 J2.MP3 J2.MP4 J3.8 J3.17 J3.MP1 J3.MP2 J4.1 R1.2 R3.1 R4.2 R6.2 R7.1 R9.1 RESET_BUTTON.1 RESET_BUTTON.2 SJ1.1 TP4.TP TP5.TP U1.2 U2.1 U2.28 U2.29_1 U2.29_2 U2.29_3 U2.29_4 U2.29_5 U2.29_6 U2.29_7 U2.29_8 U2.29_9 U3.1 U3.5 U3.7 U4.1 U4.4 U4.6 U4.9 U5.13 U6.4 U6.9
GPIO8: R10.1 U2.10
I2C_PW: C21.1 C22.1 R12.2 R13.2 U2.17 U3.2 U3.6 U3.8
INT_RTC: R19.1 TP15.TP U2.8 U5.3
IO/BOOT: BOOT_BUTTON.3 BOOT_BUTTON.4 C25.1 R15.1 U2.15
IO/CHANGE: C26.1 CHANGE_BUTTON.3 CHANGE_BUTTON.4 R16.1 U2.23
MISO: D7.2 J1.P7 R20.1 TP6.TP U2.27 U6.2
MOSI: D8.2 J1.P3 J3.14 R21.1 TP7.TP U2.7 U6.5
N$1: J2.B5 R4.1
N$2: C11.2 J3.24
N$3: C8.1 D4.1 D5.2
N$4: J2.A5 R3.2
N$5: C19.1 J3.5
N$6: C4.1 D1.1 IC1.1 IC1.3 Q1.2
N$7: R9.2 U1.5
N$8: C23.1 IC2.5
N$9: C20.1 J3.4
N$10: C13.2 J3.22
N$11: R8.2 U1.1
N$12: LED1.C R8.1
N$13: D6.1 R17.1
N$16: C15.2 J3.20
N$18: C16.2 J3.19
N$20: C17.2 J3.18
PREVGH: C14.2 D3.1 J3.21
PREVGL: C12.2 D4.2 J3.23
RESE: J3.3 Q2.2 R5.2
RESE': R5.1 R7.2 SJ1.2
RESET: C24.1 IC2.1 R14.1 RESET_BUTTON.3 RESET_BUTTON.4 U2.3
RTC_RST: U2.16 U5.4
RX: TP2.TP U2.24
SCK: D9.2 J1.P5 J3.13 R22.1 TP8.TP U2.6 U6.6
SCL: J4.4 R12.1 U2.20 U3.4 U4.7 U5.16
SDA: J4.3 R13.1 U2.19 U3.3 U4.8 U5.15
SRC: C8.2 D3.2 L1.1 Q2.3
SS_SD: D12.2 J1.P2 R25.1 U2.4
TX: TP1.TP U2.25
USB_D+: D2.4 U2.14
USB_D-: D2.6 U2.13
VBAT: C9.1 Q1.3 TP3.TP U1.3 U4.2 U4.3
VBUS: C5.1 C6.1 C10.1 D1.2 D2.2 LED1.A Q1.1 R1.1 R2.2 TP14.TP U1.4
VRTC: C27.1 C28.2 R17.2 U5.14
VUSB: J2.A4 J2.A9 J2.B4 J2.B9 R2.1

## Tracks (layer width: path | path; a pad name or v marks a point on that pad's centre or on a via)
3V3
  Top 0.15: 14,98.18 14,98.2
  Top 0.3: 52.23,33.42 R21.2 | R21.2 52.01,33.56 R20.2 R22.2 | Q3.3 79.92,24.76 R11.2 78.14,24.11 R24.2 69.02,33.22 | U2.2 10.15,44.15 10.15,43.83 13.94,40.04 R10.2 27.02,40.04 R23.2 30,45.28 30,51.2 30.91,52.11 | 30.91,52.11 U6.3 | 41.92,52.12 U6.7 U6.8 40.61,54.63 39.92,54.63 39.09,55.46 32.58,55.46 31.05,53.94 31.05,52.14 30.91,52.11 | 41.92,52.12 57.91,36.14 57.91,34.51 57,33.6 | 69.02,33.22 68.64,33.6 57,33.6 | 69.02,33.22 73.67,33.22 R19.2 | U5.2 88.68,59.76 88.68,62.05 88.53,62.2 D6.2 89.93,63.11 | 89.93,63.11 R18.2 | 46,102.2 40,102.2 34,96.2 23,96.2 | 21,97.2 21,106.82 20.45,107.37 20.45,108.41 R14.2 | 6.08,90.28 6.67,90.87 6.7,90.87 14,98.18 | 6.08,90.28 6,90.2 | R15.2 45.12,108.08 45.12,103.08 46,102.2 | R16.2 60,108.33 60,102.2 59,101.2 | 41.92,52.12 41.92,62.2 | 41.92,62.2 41.92,84.12 59,101.2 | 46,102.2 47,101.2 59,101.2 | 23,96.2 22,96.2 21,97.2 | 21,97.2 20,98.2 14,98.2 11.95,100.25 R25.2 5.71,98.77 C1.1 | 41.92,62.2 43.92,64.2 89,64.2 89.93,63.27 89.93,63.11 | 136.15,37.35 C3.1 127.13,43.24 C2.+ 124.06,43.92 IC1.5 123.3,44.66 | 136.15,37.35 154.29,19.2 165.77,19.2 J4.2 | 29.67,101.86 IC2.2 28.68,101.88 23,96.2 | J1.P4 5.71,90.36 5.99,90.36 6.08,90.28 | 93.24,60.31 92.83,60.31 R18.2 | R18.2 99,54.04 99,42.2 103.86,37.35 136.15,37.35 | R21.2 57,33.6 | 59,101.2 89,101.2 90.32,102.52 TP16.TP
32KHZ  (via drill 0.3)
  Top 0.15: R18.1 92.69,59.06 89.92,59.06 89.64,59.34 U5.1 89.64,59.48 89.64,60.73 v89.5,60.86 | v37.29,61.69 34.79,61.69 18.59,45.49 18.59,44.8 U2.9
  Bottom 0.15: v37.29,61.69 88.67,61.69 v89.5,60.86
DN
  Top 0.15: 163.6,54.63 163.6,53.94 163.74,53.8 164.57,53.8 J2.B7 | 163.6,54.63 163.74,54.77 164.57,54.77 J2.A7 | 163.6,54.63 163.46,54.77 156.4,54.77 156.12,54.49 155.01,54.49 154.87,54.63 152.24,54.63 151.83,54.22 151.83,54.08 151.55,53.8 D2.1
DP  (via drill 0.3)
  Top 0.15: J2.A6 164.71,54.22 165.05,54.22 165.35,54.52 165.35,54.98 165.15,55.18 164.71,55.18 J2.B6 164.57,55.18 164.01,55.18 163.88,55.32 v163.6,55.32 | v152.52,51.72 152.38,51.86 151.55,51.86 D2.3
  Bottom 0.15: v152.52,51.72 160,51.72 v163.6,55.32
EPD_3V3
  Top 0.3: Q3.2 C7.1 | C7.1 87.76,27.07 L1.2 | C7.1 84.61,23.81 85.33,23.08 95,23.08 | 95,23.08 99.51,23.08 TP17.TP | 95,23.08 95,22.09 C18.2 92.96,19.16 91,17.2 86.26,17.2 84.69,15.63 84.69,15.19 J3.15 J3.16
EPD_3V3_C  (via drill 0.3)
  Top 0.3: Q3.1 80.5,25.41 R11.1 79.25,25.41 v78.01,25.41 | TP13.TP 9.26,74.29 20.5,63.05 20.5,62.73 U2.18 21.08,62.11 21.08,61.42 v21.91,60.59
  Bottom 0.3: v21.91,60.59 24.13,58.37 37.12,58.37 70.08,25.41 v78.01,25.41
EPD_BUSY  (via drill 0.3)
  Top 0.15: 87.84,14.19 90.3,11.73 100.97,11.73 108.61,4.08 108.61,2.97 109.03,2.55 109.03,2.14 TP9.TP | 87.84,14.19 87.56,14.46 87.7,14.6 87.56,14.74 87.56,15.02 J3.9 | v30.22,57.82 14.57,57.82 10.97,61.42 10.97,62.11 U2.26 | v73.99,17.93 74.27,17.93 78.97,13.22 79.39,13.22 79.53,13.36 87.01,13.36 87.84,14.19
  Bottom 0.15: v73.99,17.93 73.99,21 37.17,57.82 v30.22,57.82
EPD_CS  (via drill 0.3)
  Top 0.15: v21.08,40.64 21.08,44.66 U2.11 | v21.91,32.89 22.33,32.47 22.33,31.64 TP10.TP 22.47,31.5 68.86,31.5 76.62,23.75 77.04,23.75 R24.1 77.17,23.75 77.17,21.53 D11.2 77.04,21.39 77.04,20.7 v79.25,18.48 | v85.9,15.99 86.18,15.71 86.18,15.16 J3.12
  Bottom 0.15: v21.08,40.64 21.08,33.72 v21.91,32.89 | v85.9,15.99 81.75,15.99 v79.25,18.48
EPD_DC  (via drill 0.3)
  Top 0.15: J3.11 86.59,15.02 86.59,14.46 85.76,13.63 78.97,13.63 67.06,25.55 19.7,25.55 14.43,30.81 14.43,31.36 TP11.TP 14.3,31.5 14.3,32.19 v13.74,32.75 | v13.46,41.34 13.46,44.66 U2.5
  Bottom 0.15: v13.46,41.34 13.46,33.03 v13.74,32.75
EPD_RST  (via drill 0.3)
  Top 0.15: v87.15,14.19 87.15,15.02 J3.10 | v89.22,13.77 91,12 102.21,12 112.08,2.14 112.77,2.14 TP12.TP | v31.33,58.92 19.7,58.92 17.34,61.28 17.34,62.11 U2.21
  Bottom 0.15: v87.15,14.19 88.81,14.19 89.09,13.91 | v31.33,58.92 60.42,58.92 92.41,26.93 92.41,17.23 89.09,13.91 | 89.09,13.91 v89.22,13.77
FLASH_CS  (via drill 0.3)
  Top 0.15: v31.61,46.32 31.19,45.91 31.19,45.49 R23.1 | D10.2 32.99,45.35 v32.99,46.32 34.1,47.43 34.1,53.38 33.55,53.94 33.41,53.94 32.99,54.35 32.99,54.63 U6.1 | v23.3,46.46 22.33,45.49 22.33,44.8 U2.12
  Bottom 0.15: v32.99,46.32 v31.61,46.32 31.47,46.46 v23.3,46.46
GDR  (via drill 0.3)
  Top 0.15: v90.19,13.5 91.16,14.46 91.16,15.02 J3.2 | v74.41,15.3 73.99,15.71 73.57,15.71 R6.1 73.44,15.57 73.02,15.57 72.47,16.13 69.42,16.13 69.14,15.85 69.14,15.71 68.73,15.3 68.59,15.3 Q2.1
  Bottom 0.15: v90.19,13.5 89.64,13.5 89.36,13.22 76.48,13.22 v74.41,15.3
GND  (via drill 0.3)
  Top 0.15: U2.29_5 14.16,52 14.16,53.11 U2.29_6 | J2.A1 164.57,51.17 164.57,51.45 J2.B12 | U4.6 137.7,53.94 U4.9
  other vias: 8.37,98.12 7.97,97.51 8.75,97.48 2,99.2 2.78,99.26 2.4,98.5 22.72,106.25 23.48,106.25 23.1,105.61 41,106.2 42,106.2 42,105.2 41,105.2 51,106.2 50,106.2 50,105.2 51,105.2 88.12,16.46 87.49,18.11 88.5,18.11 89.65,18.11 158.61,9.09 156.07,8.84 155.31,12.26 31,48.2 32,48.2 4.56,91.77 78.47,22.68 79.36,22.68 87.23,23.95 88,23.95 88.76,23.95 86.4,108.6 84.9,108.6 83.4,108.6 81.9,108.6 80.4,108.6 78.9,108.6 77.4,108.6 75.9,108.6 74.4,108.6 86.4,107.1 84.9,107.1 83.4,107.1 81.9,107.1 80.4,107.1 78.9,107.1 77.4,107.1 75.9,107.1 74.4,107.1 86.4,105.6 74.4,105.6 75.9,105.6 77.4,105.6 78.9,105.6 80.4,105.6 81.9,105.6 83.4,105.6 84.9,105.6 10.4,41.1 8.9,41.1 7.4,41.1 5.9,41.1 4.4,41.1 2.9,41.1 1.4,41.1 10.4,39.6 8.9,39.6 7.4,39.6 5.9,39.6 4.4,39.6 2.9,39.6 1.4,39.6 10.4,38.1 8.9,38.1 7.4,38.1 5.9,38.1 4.4,38.1 2.9,38.1 1.4,38.1 10.4,36.6 8.9,36.6 7.4,36.6 5.9,36.6 4.4,36.6 2.9,36.6 1.4,36.6 10.4,35.1 8.9,35.1 7.4,35.1 5.9,35.1 4.4,35.1 2.9,35.1 1.4,33.6 2.9,33.6 4.4,33.6 5.9,33.6 7.4,33.6 8.9,33.6 10.4,33.6 1.4,35.1 23.4,54.38 21.9,54.38 20.4,54.38 18.9,54.38 17.4,54.38 21.9,52.88 20.4,52.88 17.4,48.38 17.4,49.88 18.9,49.88 17.4,51.38 18.9,51.38 20.4,51.38 17.4,52.88 18.9,52.88 20.9,91.1 20.9,89.6 19.4,89.6 20.9,88.1 19.4,88.1 20.9,86.6 19.4,86.6 19.4,80.6 20.9,80.6 19.4,82.1 20.9,82.1 19.4,83.6 20.9,83.6 19.4,85.1 20.9,85.1 156.9,17.1 155.4,17.1 153.9,17.1 152.4,17.1 155.4,15.6 153.9,15.6 152.4,15.6 52.9,29.6 51.4,29.6 49.9,29.6 48.4,29.6 46.9,29.6 45.4,29.6 54.4,28.1 52.9,28.1 51.4,28.1 49.9,28.1 48.4,28.1 46.9,28.1 45.4,26.6 46.9,26.6 48.4,26.6 49.9,26.6 51.4,26.6 52.9,26.6 54.4,26.6 45.4,28.1 47.4,45.1 48.9,40.6 50.4,40.6 51.9,40.6 47.4,42.1 48.9,42.1 50.4,42.1 47.4,43.6 48.9,43.6 39.9,45.6 38.4,45.6 36.9,45.6 35.4,45.6 41.4,44.1 39.9,44.1 35.4,42.6 36.9,42.6 38.4,42.6 39.9,42.6 41.4,42.6 35.4,44.1 36.9,44.1 38.4,44.1 2.4,92.6 2.4,91.1 2.4,89.6 2.4,88.1 2.4,86.6 68.68,29.1 67.18,29.1 70.18,27.6 68.68,27.6 71.68,26.1 70.18,26.1 73.18,24.6 71.68,24.6 101.9,19.6 100.4,19.6 100.4,13.6 101.9,13.6 100.4,15.1 101.9,15.1 100.4,16.6 101.9,16.6 100.4,18.1 101.9,18.1
  pour Top: -12,123.2 180,123.2 186,117.2 186,-12.8 184,-14.8 -13,-14.8 -15,-12.8 -15,120.2
  pour Bottom: -12,124.2 205,124.2 208,121.2 208,3.2 189,-15.8 0,-15.8 -6,-9.8 -6,118.2
GPIO8
  Top 0.15: R10.1 19.84,41.47 19.84,44.66 U2.10
I2C_PW  (via drill 0.3)
  Top 0.15: R13.2 155.57,7.4 156.54,7.4 R12.2 156.67,7.4 157.5,7.4 C21.1 157.64,7.4 | 157.64,7.4 C22.1 | 155.29,11.28 155.29,10.59 U3.8 | 155.29,11.28 155.57,11.56 156.12,11.56 | 156.12,11.56 156.54,11.56 156.81,11.28 156.81,10.59 U3.6 156.81,10.45 156.81,9.89 157.64,9.06 157.64,7.4 | 156.12,11.56 156.12,13.36 U3.2 | v32.44,60.03 23.71,60.03 22.33,61.42 22.33,62.11 U2.17 | 155.29,11.28 v155.15,11.42
  Bottom 0.15: v32.44,60.03 78.84,60.03 127.45,11.42 v155.15,11.42
INT_RTC  (via drill 0.3)
  Top 0.15: 85.21,48.81 86.32,47.71 86.73,47.71 R19.1 | 85.21,48.81 85.21,48.95 85.35,49.09 85.35,51.17 85.21,51.31 85.21,56.29 87.15,58.23 87.15,59.34 U5.3 | v17.2,40.64 17.2,44.66 U2.8 | v19.42,32.89 19.56,32.75 TP15.TP | 85.21,48.81 70.5,34.11 v60.28,34.11
  Bottom 0.15: v17.2,40.64 17.2,35.1 v19.42,32.89 21.91,30.39 56.59,30.39 60.28,34.08 v60.28,34.11
IO/BOOT  (via drill 0.3)
  Top 0.15: C25.1 54.05,109.2 52.8,109.2 52.38,109.62 51.83,109.62 BOOT_BUTTON.3 51.69,109.62 48.37,109.62 BOOT_BUTTON.4 48.23,109.62 47.67,109.62 46.98,108.92 46.98,108.09 46.84,107.95 46.29,107.95 R15.1 46.15,107.81 46.15,107.54 v45.74,107.12 | v40.2,101.58 24.82,86.21 24.82,62.25 U2.15
  Bottom 0.15: v45.74,107.12 v40.2,101.58
IO/CHANGE  (via drill 0.3)
  Top 0.15: C26.1 69.14,109.2 67.76,109.2 67.34,109.62 66.79,109.62 CHANGE_BUTTON.3 66.65,109.62 63.33,109.62 CHANGE_BUTTON.4 63.19,109.62 62.63,109.62 62.08,109.06 62.08,108.64 61.39,107.95 60.83,107.95 R16.1 60.69,107.81 60.55,107.68 v60.55,107.12 | v18.04,64.6 16.37,64.6 14.71,62.94 14.71,62.25 U2.23
  Bottom 0.15: v60.55,107.12 v18.04,64.6
MISO  (via drill 0.3)
  Top 0.15: D7.2 50.58,36.76 50.86,36.49 50.86,34.96 R20.1 50.72,34.96 49.06,34.96 48.37,34.27 40.89,34.27 31.75,43.41 | 31.75,43.41 20.94,32.61 20.94,29.29 22.33,27.9 TP6.TP | 31.75,43.41 32.02,43.69 32.02,46.04 33.83,47.84 33.83,52.42 33.55,52.69 33.41,52.69 32.99,53.11 32.99,53.25 U6.2 32.86,53.38 32.16,53.38 v32.02,53.52 | v28.98,56.57 14.43,56.57 9.73,61.28 9.73,62.11 U2.27 9.59,62.25 9.59,62.94 v9.17,63.36 | v6.96,91.89 6.96,93.41 6.68,93.69 5.85,93.69 J1.P7
  Bottom 0.15: v32.02,53.52 v28.98,56.57 | v6.96,91.89 6.96,65.57 v9.17,63.36
MOSI  (via drill 0.3)
  Top 0.15: v15.96,40.64 15.96,44.66 U2.7 15.96,44.8 15.96,45.49 v15.54,45.91 | v18.31,28.87 19.28,27.9 TP7.TP | v15.54,68.76 15.54,80.53 6.82,89.26 5.85,89.26 J1.P3 | v56.54,30.95 62.49,30.95 79.25,14.19 84.79,14.19 85.07,14.46 85.07,15.02 J3.14 | v52.94,34.55 52.52,34.96 52.11,34.96 | v45.74,41.75 40.75,46.74 40.75,50.75 U6.5 | 52.11,34.96 52.11,36.9 D8.2 | 52.11,34.96 R21.1
  Bottom 0.15: v18.31,28.87 15.96,31.22 v15.96,40.64 16.51,40.64 17.62,41.75 v45.74,41.75 v52.94,34.55 v56.54,30.95 | v15.54,45.91 v15.54,68.76
N$1  (via drill 0.3)
  Top 0.15: v161.66,54.22 157.37,49.92 153.9,49.92 R4.1 | v163.6,56.15 163.74,56.29 164.57,56.29 J2.B5
  Bottom 0.15: v163.6,56.15 v161.66,54.22
N$2
  Top 0.15: J3.24 80.08,15.16 80.08,18.62 78.97,19.73 78.97,20 C11.2
N$3
  Top 0.15: C8.1 96.01,29.29 95.73,29.01 95.73,28.87 92.83,25.96 91.03,25.96 90.89,25.82 D4.1 90.75,25.82 90.75,26.1 88.81,28.04 88.81,30.81 87.42,32.19 87.42,33.72 D5.2
N$4
  Top 0.15: R3.2 154.04,48.68 159.17,48.68 163.74,53.25 164.57,53.25 J2.A5
N$5  (via drill 0.3)
  Top 0.15: v90.33,14.33 89.78,14.33 89.64,14.46 89.64,15.02 J3.5 | v97.4,17.51 97.81,17.93 98.23,17.93 C19.1
  Bottom 0.15: v90.33,14.33 94.21,14.33 v97.4,17.51
N$6  (via drill 0.3)
  Top 0.15: C4.1 117.2,40.64 117.2,42.58 D1.1 117.34,42.72 120.53,42.72 IC1.3 120.66,42.86 121.22,42.86 121.5,43.14 121.5,44.1 | 121.5,44.1 121.5,44.24 120.94,44.8 120.8,44.8 120.66,44.66 IC1.1 | v122.88,45.35 130.91,45.35 132.3,46.74 132.71,46.74 Q1.2 | 121.5,44.1 v121.63,44.1
  Bottom 0.15: v121.63,44.1 v122.88,45.35
N$7
  Top 0.15: R9.2 121.63,52 122.88,52 123.71,51.17 124.27,51.17 U1.5
N$8
  Top 0.15: IC2.5 32.44,102.83 33.27,102.83 33.69,102.41 34.1,102.41 C23.1
N$9
  Top 0.15: J3.4 90.06,15.16 90.06,15.57 89.78,15.85 89.78,16.13 90.33,16.68 94.63,16.68 95.87,17.93 96.29,17.93 C20.1
N$10
  Top 0.15: J3.22 81.19,15.16 81.19,17.65 83.27,19.73 83.27,20 C13.2
N$11
  Top 0.15: R8.2 116.23,53.25 116.23,53.8 116.65,54.22 124.68,54.22 125.79,53.11 125.79,52.17 126.79,51.17 126.9,51.17 U1.1
N$12
  Top 0.15: LED1.C 120.39,53.38 117.62,53.38 117.48,53.25 R8.1
N$13
  Top 0.15: D6.1 86.45,63.08 86.45,62.25 86.73,61.97 86.73,61.55 R17.1
N$16
  Top 0.15: J3.20 82.16,15.16 82.16,15.71 86.32,19.87 87.15,19.87 87.28,20 C15.2
N$18
  Top 0.15: J3.19 82.58,15.16 82.58,15.71 86.32,19.45 88.12,19.45 88.81,20.14 89.22,20.14 C16.2
N$20
  Top 0.15: J3.18 83.13,15.16 83.13,15.85 86.45,19.17 89.92,19.17 90.89,20.14 91.3,20.14 C17.2
PREVGH  (via drill 0.3)
  Top 0.15: 85.35,20 85.35,19.73 81.61,15.99 81.61,15.16 J3.21 | v91.86,26.52 94.21,28.87 94.21,29.29 D3.1 | v86.18,20.42 85.76,20 85.35,20 | 85.35,20 C14.2
  Bottom 0.15: v91.86,26.52 91.86,26.1 v86.18,20.42
PREVGL  (via drill 0.3)
  Top 0.15: J3.23 80.64,15.16 80.64,19.45 80.92,19.73 80.92,20 C12.2 81.05,20 81.47,20 v81.88,20.42 | v86.32,24.85 92.13,24.85 93.1,25.82 94.21,25.82 D4.2
  Bottom 0.15: v81.88,20.42 v86.32,24.85
RESE  (via drill 0.3)
  Top 0.15: v90.33,15.99 90.61,15.71 90.61,15.16 J3.3 | v75.1,15.3 74.54,14.74 70.39,14.74 70.25,14.88 69.83,14.88 69.7,15.02 | 69.7,15.02 69.7,15.16 Q2.2 69.7,15.02 | 69.7,15.02 69.7,14.88 69.83,14.74 69.83,11.83 R5.2
  Bottom 0.15: v90.33,15.99 86.59,15.99 85.9,15.3 v75.1,15.3
RESE'
  Top 0.15: R5.1 69.7,10.45 68.17,10.45 SJ1.2 68.03,10.45 68.03,12.25 R7.2
RESET  (via drill 0.3)
  Top 0.15: R14.1 21.22,107.95 21.77,107.95 22.05,108.23 22.05,109.06 22.61,109.62 23.16,109.62 RESET_BUTTON.4 23.3,109.62 26.62,109.62 RESET_BUTTON.3 26.76,109.62 27.45,109.62 27.87,109.2 28.15,109.2 | 28.15,109.2 29.12,109.2 C24.1 | 28.15,109.2 28.15,107.4 29.67,105.88 29.67,102.97 IC2.1 29.53,102.83 29.12,102.83 v28.7,102.41 | v10.97,50.34 10.97,44.8 U2.3
  Bottom 0.15: v10.97,50.34 10.97,84.69 v28.7,102.41
RTC_RST  (via drill 0.3)
  Top 0.15: v32.99,60.59 24.41,60.59 23.71,61.28 23.71,62.11 U2.16 | v79.67,60.59 80.08,60.59 80.36,60.86 85.62,60.86 85.76,60.73 85.76,59.48 U5.4
  Bottom 0.15: v79.67,60.59 v32.99,60.59
RX
  Top 0.15: U2.24 13.33,62.25 13.33,63.08 6.26,70.14 2.52,70.14 TP2.TP
SCK  (via drill 0.3)
  Top 0.15: v14.71,40.64 14.71,44.66 U2.6 | v14.85,29.01 14.85,28.87 14.43,28.45 14.43,27.76 TP8.TP | v4.6,91.06 5.02,91.47 5.71,91.47 J1.P5 | v52.11,30.95 52.66,30.39 62.63,30.39 79.11,13.91 85.07,13.91 85.62,14.46 85.62,15.02 J3.13 | v48.23,34.83 47.4,34.83 R22.1 47.26,34.96 47.26,36.76 D9.2 47.26,36.9 46.98,36.9 46.29,37.6 46.29,46.46 41.3,51.45 41.16,51.45 40.75,51.86 40.75,52 U6.6 40.61,52.14 40.06,52.14 v39.78,51.86
  Bottom 0.15: v14.85,29.01 14.71,29.15 v14.71,40.64 14.71,40.78 | v4.6,91.06 4.6,65.3 10.42,59.48 10.42,45.07 14.71,40.78 | v48.23,34.83 v52.11,30.95 | 14.71,40.78 15.4,40.78 26.48,51.86 v39.78,51.86
SCL  (via drill 0.3)
  Top 0.15: 159.72,10.73 159.72,5.6 159.31,5.19 156.95,5.19 156.67,5.46 156.67,5.88 R12.1 | 159.72,10.73 157.64,12.8 157.64,13.36 U3.4 | v139.36,48.4 139.36,54.22 139.08,54.49 138.95,54.35 138.53,54.35 U4.7 | v165.4,21.67 165.81,21.25 165.81,21.11 165.95,20.97 J4.4 166.09,21.11 166.65,21.11 167.48,20.28 167.48,17.37 160.83,10.73 159.72,10.73 | v19.56,61 19,61 18.59,61.42 18.59,62.11 U2.20 | U5.16 89.78,50.2 89.78,51.15 v89.35,51.57
  Bottom 0.15: v165.4,21.67 139.36,47.71 v139.36,48.4 90.89,48.4 89.36,49.92 89.36,51.58 | v19.56,61 21.64,61 21.77,61.14 79.81,61.14 89.36,51.58 | v89.35,51.57 89.36,51.58
SDA  (via drill 0.3)
  Top 0.15: 156.81,14.19 156.54,14.46 154.87,14.46 154.46,14.05 154.46,6.57 155.01,6.02 155.43,6.02 R13.1 | 156.81,14.19 156.81,13.5 U3.3 | v144.9,42.86 144.9,40.37 165.26,20 165.95,20 J4.3 166.09,20 166.65,20 167.2,19.45 167.2,17.51 166.92,17.23 159.86,17.23 156.81,14.19 | U4.8 138.53,55.05 138.53,55.18 138.81,55.46 138.95,55.46 v144.89,49.52 | v31.89,59.48 21.77,59.48 19.84,61.42 19.84,62.11 U2.19 | 88.12,49.37 88.25,49.51 88.25,50.06 U5.15 88.12,49.37 | 88.12,49.37 v87.7,48.95 | v91.03,48.95 90.33,48.95 90.06,48.68 88.67,48.68 88.39,48.95 88.39,49.09 88.12,49.37
  Bottom 0.15: v144.9,42.86 144.9,48.95 | 144.9,48.95 144.9,49.51 v144.89,49.52 | v31.89,59.48 77.17,59.48 v87.7,48.95 | v91.03,48.95 144.9,48.95
SRC  (via drill 0.3, 0.35)
  Top 0.15: C8.2 95.87,30.81 92.96,30.81 91.44,29.29 90.89,29.29 D3.2 90.75,29.29 v89.36,29.29 | v72.61,17.37 69.28,17.37 Q2.3 | v84,25.2 83.18,26.02 L1.1
  Bottom 0.15: v72.61,17.37 77.45,17.37 85.14,25.06 | v89.36,29.29 85.14,25.06 | 85.14,25.06 85,25.2 v84,25.2
SS_SD
  Top 0.15: D12.2 9.73,98.53 9.31,98.53 8.89,98.95 7.23,98.95 R25.1 7.23,98.81 7.23,97.84 4.46,95.07 4.46,93.27 4.05,92.86 4.05,89.12 5.16,88.01 | 5.16,88.01 5.43,88.29 6.12,88.29 J1.P2 | 5.16,88.01 4.74,87.59 4.74,82.75 1.14,79.14 1.14,74.85 1,74.71 1,74.02 1.14,73.88 1.14,70.7 1,70.56 1,69.87 1.14,69.73 1.14,66.68 1,66.54 1,65.71 1.83,64.88 5.02,64.88 7.37,62.53 7.37,54.63 12.22,49.78 12.22,44.8 U2.4
TX
  Top 0.15: U2.25 12.08,62.25 12.08,62.94 8.76,66.26 2.52,66.26 TP1.TP
USB_D+  (via drill 0.3)
  Top 0.15: v152.52,52.42 153.07,51.86 153.9,51.86 D2.4 | U2.14 24.96,44.8 25.1,44.94 25.1,48.48 38.87,62.25 v39.23,62.25
  Bottom 0.15: v152.52,52.42 98.64,52.42 88.81,62.25 v39.23,62.25
USB_D-  (via drill 0.3)
  Top 0.15: v152.52,53.66 153.9,53.66 D2.6 | U2.13 23.71,44.8 23.85,44.94 23.85,47.63 39.03,62.8 v39.5,62.8
  Bottom 0.15: v152.52,53.66 97.81,53.66 88.67,62.8 v39.5,62.8
VBAT
  Top 0.3: U1.3 128.66,54.81 128.66,54.82 129.39,55.54 | 129.39,55.54 C9.1 | Q1.3 135.81,52.79 135.81,53.67 135.99,53.85 136.38,53.85 U4.3 U4.2 134,54.44 | 134,54.44 130.49,54.44 129.39,55.54 | 134,54.44 134,62.69 TP3.TP
VBUS
  Top 0.3: TP14.TP 155.6,59.01 C5.1 151.68,55.24 150.55,54.12 150.55,53.3 150,52.75 | C6.1 149.36,52.75 150,52.75 | 150,52.75 D2.2 | C6.1 150,50.49 150,46.2 150.03,46.18 150.16,46.04 150.16,45.35 R2.2 | R1.1 116.8,44.35 D1.2 119.85,47.4 C10.1 124.8,47.4 125.21,46.99 | 125.21,46.99 126,46.2 130.37,46.2 Q1.1 131.05,46.88 131.61,46.88 132.57,47.84 143.93,47.84 148.09,52 148.5,52 C6.1 | LED1.A 122.19,53.11 U1.4 124.4,52.97 124.4,52.55 125.65,51.31 125.65,47.43 125.21,46.99
VRTC
  Top 0.3: C28.2 95.6,49.78 95.32,50.06 92.96,50.06 C27.1 92.83,50.06 91.58,50.06 89.5,52.14 87.84,52.14 | 87.84,52.14 87.15,51.45 87.15,50.2 U5.14 | R17.2 87.98,61.42 87.98,60.86 87.81,60.7 87.81,58.37 87.84,58.34 87.84,52.14
VUSB
  Top 0.3: J2.A9 164.57,56.98 164.57,56.85 J2.B4 164.71,56.71 165.26,56.71 165.81,56.15 165.81,52.87 165.22,52.28 164.71,52.28 J2.B9 164.57,52.14 164.57,52 J2.A4 164.5,51.88 163.89,51.88 158.21,46.2 155,46.2 155,45.35 154.74,45.35 R2.1
(copper drawn outside any net)
  shapes: Top area x1

## Text on the board
SilkscreenTop: GND | 3V3 | 3V3_C | RX | TX | VBAT | VBUS | EPD_DC | INT_RTC | EPD_CS | L1 | SCK | MOSI | MISO | GND | EPD_3V3 | EPD_RST | EPD_BUSY